# EAGLE board Modulo de expansao_01 (EAGLE 7.6.0)
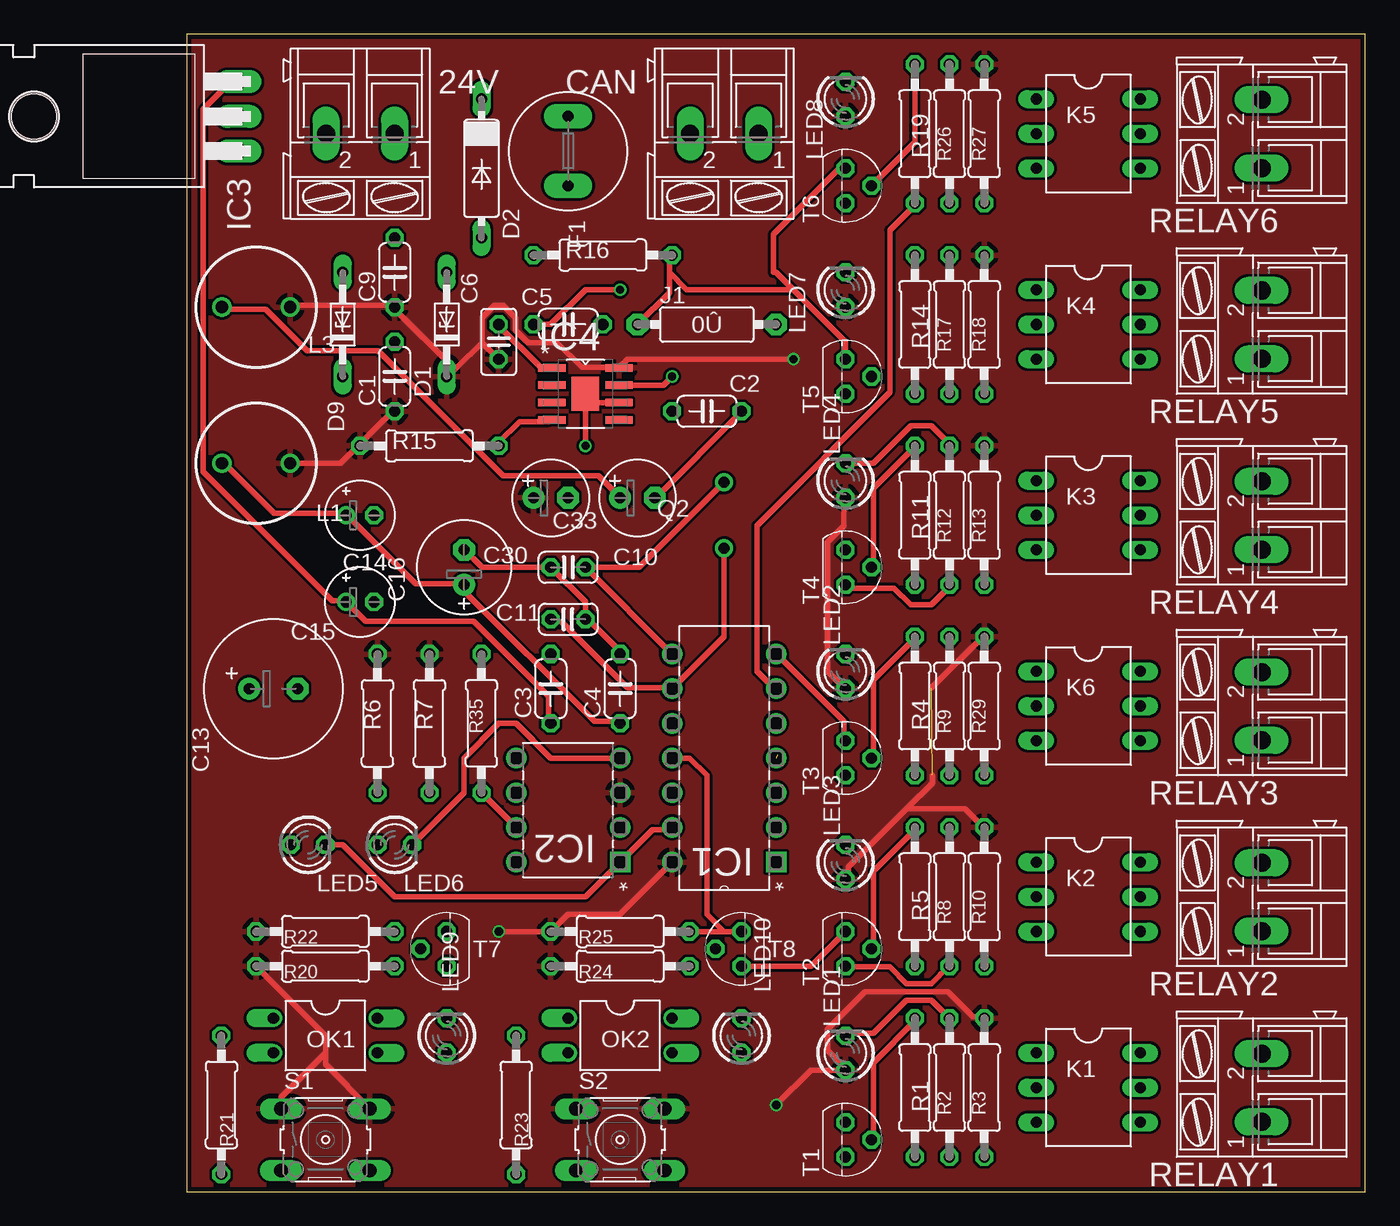
[diagram p0: board, top side]
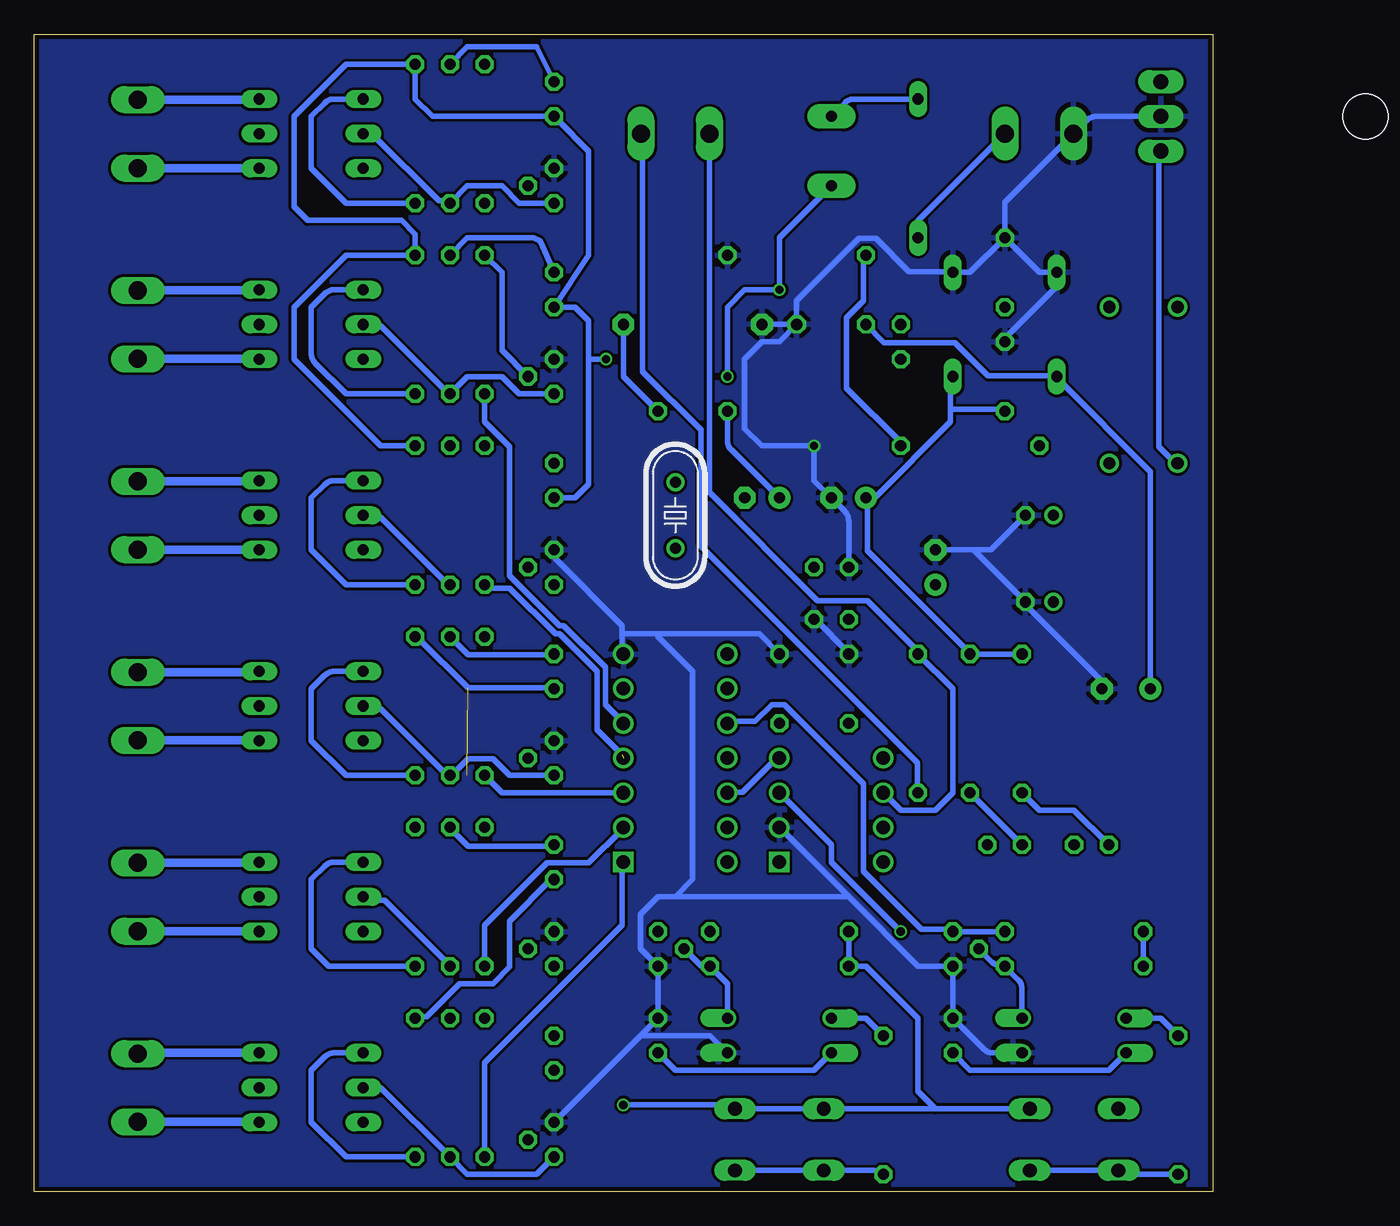
[diagram p1: board, bottom side, seen from below]

Size 86.34 x 84.76 mm. Coordinates in mm from the lower left corner, seen from the top.
Outline: 0,0 86.34,0 86.34,84.76 0,84.76 0,0
Copper layers (1*16): Top 0.035mm / dielectric 1.5mm / Bottom 0.035mm
Design rules "rules_IPCA_EEC_v2017": minimum track width 6mil, minimum drill 0.6mm, track to track 8mil, track to pad 14mil, pad to pad 14mil, via to via 8mil, smd to smd 8mil, copper to edge 14mil, drill to drill 14mil, minimum pad ring 10mil, minimum via ring 6mil, stop-mask expansion 2mil, vias tented up to drill 100mil, thermal gap 14mil
Net classes: 0 default: width 0.406 mm, drill 0.6 mm

## Footprints (pad centres in the part's own frame; a part is rotated, then mirrored left to right if it is on the bottom)
AK300/2 = drill 1.321 long: 1 -2.515,0; 2 2.489,0
C050-024X044 = drill 0.813 octagon: 1 -2.54,0; 2 2.54,0
C025-025X050 = drill 0.813 octagon: 1 -1.27,0; 2 1.27,0
C025-024X044 = drill 0.813 octagon: 1 -1.27,0; 2 1.27,0
E3,5-10 = drill 0.813 pad 1.6: + -1.778,0 | drill 0.813 pad 1.6 octagon: - 1.778,0
E2-5 = drill 0.813 pad 1.27: + -1.016,0 | drill 0.813 pad 1.27 octagon: - 1.016,0
E2,5-7 = drill 0.813 pad 1.6: + -1.27,0 | drill 0.813 pad 1.6 octagon: - 1.27,0
E2,5-6 = drill 0.813 pad 1.6: + -1.27,0 | drill 0.813 pad 1.6 octagon: - 1.27,0
DO34Z7 = drill 0.813 long: A 3.81,0; C -3.81,0
DO07 = drill 0.813 long: A 5.08,0; C -5.08,0
TR5 = drill 0.813 pad 1.778 long: 1 -2.54,0; 2 2.54,0
DIP254P762X432-14 = drill 0.991 square: 1 -7.62,15.24 | drill 0.991: 2 -7.62,12.7; 3 -7.62,10.16; 4 -7.62,7.62; 5 -7.62,5.08; 6 -7.62,2.54; 7 -7.62,0; 8 0,0; 9 0,2.54; 10 0,5.08; 11 0,7.62; 12 0,10.16; 13 0,12.7; 14 0,15.24
DIP254P762X432-8 = drill 0.991 square: 1 -7.62,7.62 | drill 0.991: 2 -7.62,5.08; 3 -7.62,2.54; 4 -7.62,0; 5 0,0; 6 0,2.54; 7 0,5.08; 8 0,7.62
TO220H = drill 1.118 long: 1 -2.54,-10.16; 2 0,-10.16; 3 2.54,-10.16 | hole 3.302: 0,4.826
SOIC127P600X170-9N = smd 1.981 x 0.559: 1 -2.464,1.905; 2 -2.464,0.635; 3 -2.464,-0.635; 4 -2.464,-1.905; 5 2.464,-1.905; 6 2.464,-0.635; 7 2.464,0.635; 8 2.464,1.905 | smd 2.007 x 2.489: 9 0,0
0R/10 = drill 0.813 pad 1.6 octagon: 1 -5.08,0; 2 5.08,0
DIL06 = drill 0.813 long: 1 -2.54,-3.81; 2 0,-3.81; 3 2.54,-3.81; 4 2.54,3.81; 5 0,3.81; 6 -2.54,3.81
6000-XXXX-RC = drill 0.9 pad 1.422: 1 -2.5,0; 2 2.5,0
LED3MM = drill 0.813 octagon: A -1.27,0; K 1.27,0
DIL04 = drill 0.813 offset: 1 -1.27,-3.81; 2 1.27,-3.81; 3 1.27,3.81; 4 -1.27,3.81
HC49/S = drill 0.813: 1 -2.413,0; 2 2.413,0
0207/10 = drill 0.813 octagon: 1 -5.08,0; 2 5.08,0
B3F-10XX = drill 1.016 long: 1 -3.251,2.261; 2 3.251,2.261; 3 -3.251,-2.261; 4 3.251,-2.261
TO92 = drill 0.813 octagon: 1 1.27,0; 2 0,1.905; 3 -1.27,0

## Placement (x,y rotation side)
24V  [AK300/2]  12.7,77.47 180 top
C1  100nF  [C050-024X044]  15.24,59.69 90 top
C2  100nF  [C050-024X044]  38.1,57.15 0 top
C3  100nF  [C050-024X044]  26.67,36.83 90 top
C4  100nF  [C050-024X044]  31.75,36.83 90 top
C5  100nF  [C050-024X044]  27.94,63.5 0 top
C6  10nF  [C025-025X050]  22.86,62.23 90 top
C9  100n  [C050-024X044]  15.24,67.31 90 top
C10  15p  [C025-024X044]  27.94,45.72 0 top
C11  15p  [C025-024X044]  27.94,41.91 180 top
C13  100uF/50V  [E3,5-10]  6.35,36.83 0 top
C14  100uF/15V  [E2-5]  12.7,49.53 0 top
C15  10uF/15V  [E2-5]  12.7,43.18 0 top
C16  220uF/ESR  [E2,5-7]  20.32,45.72 90 top
C30  10uF/15V  [E2,5-6]  26.67,50.8 0 top
C33  10uF/15V  [E2,5-6]  33.02,50.8 0 top
CAN  [AK300/2]  39.37,77.47 180 top
D1  SB3100  [DO34Z7]  19.05,63.5 90 top
D2  1N5400G-T  [DO07]  21.59,74.93 270 top
D9  BZV85C33  [DO34Z7]  11.43,63.5 90 top
F1  [TR5]  27.94,76.2 270 top
IC1  MCP25050-I/P  [DIP254P762X432-14]  35.56,39.37 180 top
IC2  MCP2551-I/P  [DIP254P762X432-8]  24.13,31.75 180 top
IC3  LM1117T-3.3/NOPB  [TO220H]  -6.35,78.74 90 top
IC4  [SOIC127P600X170-9N]  29.21,58.42 0 top
J1  [0R/10]  38.1,63.5 0 top
K1  AQV21  [DIL06]  66.04,7.62 270 top
K2  AQV21  [DIL06]  66.04,21.59 270 top
K3  AQV21  [DIL06]  66.04,49.53 270 top
K4  AQV21  [DIL06]  66.04,63.5 270 top
K5  AQV21  [DIL06]  66.04,77.47 270 top
K6  AQV21  [DIL06]  66.04,35.56 270 top
L1  15uH/3A  [6000-XXXX-RC]  5.08,53.34 0 top
L3  22uH/5mA  [6000-XXXX-RC]  5.08,64.77 180 top
LED1  [LED3MM]  48.26,10.16 90 top
LED2  [LED3MM]  48.26,38.1 90 top
LED3  [LED3MM]  48.26,24.13 90 top
LED4  [LED3MM]  48.26,52.07 90 top
LED5  [LED3MM]  8.89,25.4 0 top
LED6  [LED3MM]  15.24,25.4 0 top
LED7  [LED3MM]  48.26,66.04 90 top
LED8  [LED3MM]  48.26,80.01 90 top
LED9  [LED3MM]  19.05,11.43 90 top
LED10  [LED3MM]  40.64,11.43 90 top
OK1  LTV816  [DIL04]  10.16,11.43 270 top
OK2  LTV816  [DIL04]  31.75,11.43 270 top
Q2  20M  [HC49/S]  39.37,49.53 270 bottom
R1  1K  [0207/10]  53.34,7.62 90 top
R2  1K  [0207/10]  55.88,7.62 90 top
R3  150  [0207/10]  58.42,7.62 90 top
R4  1K  [0207/10]  53.34,35.56 90 top
R5  1K  [0207/10]  53.34,21.59 90 top
R6  330  [0207/10]  13.97,34.29 270 top
R7  330  [0207/10]  17.78,34.29 270 top
R8  1K  [0207/10]  55.88,21.59 90 top
R9  1K  [0207/10]  55.88,35.56 90 top
R10  150  [0207/10]  58.42,21.59 90 top
R11  1K  [0207/10]  53.34,49.53 90 top
R12  1K  [0207/10]  55.88,49.53 90 top
R13  150  [0207/10]  58.42,49.53 90 top
R14  1K  [0207/10]  53.34,63.5 90 top
R15  10K  [0207/10]  17.78,54.61 180 top
R16  3K24  [0207/10]  30.48,68.58 180 top
R17  1K  [0207/10]  55.88,63.5 90 top
R18  150  [0207/10]  58.42,63.5 90 top
R19  1K  [0207/10]  53.34,77.47 90 top
R20  10k  [0207/10]  10.16,16.51 180 top
R21  220  [0207/10]  2.54,6.35 270 top
R22  10K  [0207/10]  10.16,19.05 180 top
R23  220  [0207/10]  24.13,6.35 270 top
R24  10k  [0207/10]  31.75,16.51 180 top
R25  10K  [0207/10]  31.75,19.05 180 top
R26  1K  [0207/10]  55.88,77.47 90 top
R27  150  [0207/10]  58.42,77.47 90 top
R29  150  [0207/10]  58.42,35.56 90 top
R35  120  [0207/10]  21.59,34.29 90 top
RELAY1  [AK300/2]  78.74,7.62 90 top
RELAY2  [AK300/2]  78.74,21.59 90 top
RELAY3  [AK300/2]  78.74,35.56 90 top
RELAY4  [AK300/2]  78.74,49.53 90 top
RELAY5  [AK300/2]  78.74,63.5 90 top
RELAY6  [AK300/2]  78.74,77.47 90 top
S1  [B3F-10XX]  10.16,3.81 0 top
S2  [B3F-10XX]  31.75,3.81 0 top
T1  2N3904  [TO92]  48.26,3.81 270 top
T2  2N3904  [TO92]  48.26,17.78 270 top
T3  2N3904  [TO92]  48.26,31.75 270 top
T4  2N3904  [TO92]  48.26,45.72 270 top
T5  2N3904  [TO92]  48.26,59.69 270 top
T6  2N3904  [TO92]  48.26,73.66 270 top
T7  2N3904  [TO92]  19.05,17.78 90 top
T8  2N3904  [TO92]  40.64,17.78 90 top

## Library data of the parts
24V CAN RELAY1-RELAY6 = con-ptr500; OC_FARNELL: unknown; OC_NEWARK: unknown
C1-C6 C9-C11 C13-C16 C30 C33 L1 L3 R1-R27 R29 R35 = rcl
D1 D2 D9 = diode
F1 = fuse; OC_FARNELL: unknown; OC_NEWARK: unknown
IC1 = MCP25050-IP; MPN: MCP25050-I/P; OC_FARNELL: 1439736; OC_NEWARK: 59K0224; PACKAGE: DIP-14; SUPPLIER: Microchip
IC2 = MCP2551-IP; DESCRIPTION: CAN CTRL; MPN: MCP2551-I/P; OC_FARNELL: 1292240; OC_NEWARK: 61K2947; PACKAGE: PDIP-8; SUPPLIER: Microchip
IC3 = linear
IC4 = texas_tps5430; MPN: TPS5430DDAG4; OC_FARNELL: 1220987; OC_NEWARK: 05M1620; PACKAGE: SOIC-8; SUPPLIER: TEXAS INSTRUMENTS
J1 = jumper
K1-K6 = relay; MPN: AQV210; OC_FARNELL: 1704179; OC_NEWARK: 13P0968
LED1-LED10 = led
OK1 OK2 = optocoupler; OC_FARNELL: unknown; OC_NEWARK: unknown
Q2 = crystal; OC_FARNELL: 1667008; OC_NEWARK: unknown
S1 S2 = switch-omron; MPN: B3F-1000; OC_FARNELL: 176432; OC_NEWARK: 36M3542
T1-T8 = transistor

## Nets
5V: C1.1 C6.1 C9.1 C30.+ D1.C IC1.14 IC2.3 IC4.8 L1.2 L3.1 LED1.A LED2.A LED3.A LED4.A LED7.A LED8.A R3.2 R6.1 R7.1 R10.2 R13.2 R15.2 R18.2 R20.2 R22.2 R24.2 R25.2 R27.2 R29.2 S1.1 S1.2 S2.1 S2.2
24V: 24V.1 D2.A
+3.3V: C3.1 C15.+ IC3.3
AGND: C2.2 C33.- J1.2
GND: 24V.2 C1.2 C3.2 C4.2 C5.2 C9.2 C10.1 C11.1 C13.- C14.- C15.- C16.- C30.- D1.A D9.A IC1.7 IC2.2 IC3.2 IC4.6 IC4.9 J1.1 LED9.K LED10.K OK1.3 OK2.3 R16.1 T1.3 T2.3 T3.3 T4.3 T5.3 T6.3 T7.3 T8.3
GP0: IC1.1 R1.1
GP1: IC1.2 R5.1
GP2: IC1.3 R4.1
GP3: IC1.4 R11.1
GP4: IC1.5 R14.1
GP5: IC1.6 R19.1
GP6: IC1.10 R22.1 T7.1
GP7: IC1.11 R25.1 T8.1
N$1: LED1.K R2.2
N$2: K1.2 R2.1 T1.1
N$3: R1.2 T1.2
N$4: K1.6 RELAY1.2
N$5: K1.4 RELAY1.1
N$6: LED3.K R8.2
N$7: K2.2 R8.1 T2.1
N$8: R5.2 T2.2
N$9: K2.6 RELAY2.2
N$10: R4.2 T3.2
N$11: LED2.K R9.2
N$12: K6.2 R9.1 T3.1
N$13: K6.6 RELAY3.2
N$14: K6.4 RELAY3.1
N$15: K2.4 RELAY2.1
N$16: LED4.K R12.2
N$17: K3.2 R12.1 T4.1
N$18: R11.2 T4.2
N$19: K3.6 RELAY4.2
N$20: K3.4 RELAY4.1
N$21: C5.1 C13.+ D9.C F1.2 IC4.7
N$22: LED7.K R17.2
N$23: D2.C F1.1
N$24: LED5.A R6.2
N$25: LED6.A R7.2
N$26: K4.2 R17.1 T5.1
N$27: R14.2 T5.2
N$28: K4.6 RELAY5.2
N$29: K4.4 RELAY5.1
N$30: LED8.K R26.2
N$31: CAN.2 IC2.6 R35.2
N$32: CAN.1 IC2.7 R35.1
N$33: K5.2 R26.1 T6.1
N$34: R19.2 T6.2
N$35: K5.6 RELAY6.2
N$36: K5.4 RELAY6.1
N$37: OK1.4 R20.1 T7.2
N$38: R23.2 S2.3 S2.4
N$39: OK2.1 R23.1
N$40: OK2.4 R24.1 T8.2
N$41: LED9.A OK1.2
N$42: LED10.A OK2.2
N$43: K2.1 R10.1
N$44: K4.1 R18.1
N$45: K1.1 R3.1
N$46: K3.1 R13.1
N$47: K5.1 R27.1
N$48: K6.1 R29.1
N$57: R21.2 S1.3 S1.4
N$59: OK1.1 R21.1
N$65: C4.1 C14.+ C16.+ IC3.1 L1.1
N$66: C6.2 IC4.1
N$67: IC4.4 R15.1 R16.2
OSC1: C10.2 IC1.8 Q2.1
OSC2: C11.2 IC1.9 Q2.2
RXCAN: IC1.12 IC2.4 LED6.K
TXCAN: IC1.13 IC2.1 LED5.K
VCC/2: C2.1 C33.+ L3.2

## Tracks (layer width: path | path; a pad name or v marks a point on that pad's centre or on a via)
5V  (via drill 0.6)  (1 unrouted)
  Top 0.406: 52.73,28.04 48.46,23.77 48.46,22.86 LED3.A | 52.73,28.04 57,28.04 58.22,26.82 R10.2 | LED4.A 48.16,50.6 48.16,48.77 46.94,47.55 46.94,38.1 48.16,36.88 LED2.A | C1.1 15.24,57.3 12.8,54.86 R15.2 12.5,54.56 11.28,53.34 L1.2 | 21.64,62.18 21.64,64.01 22.55,64.92 23.16,64.92 24.08,64.01 24.08,63.09 24.99,62.18 27.13,62.18 28.96,60.35 31.39,60.35 IC4.8 32.31,60.96 v44.45,60.96 | C6.1 21.64,62.18 | 21.64,62.18 19.81,60.35 | 19.81,60.35 19.2,59.74 D1.C | 19.81,60.35 19.51,60.35 15.24,64.62 C9.1 15.24,64.92 7.62,64.92 L3.1 | R3.2 58.22,12.8 57.61,12.8 55.78,14.63 49.68,14.63 46.94,11.89 46.94,10.36 48.16,9.14 LED1.A 45.72,8.89 v43.18,6.35 | 54.56,36.88 58.22,40.54 R29.2 | 52.73,28.04 54.61,29.92 54.61,30.48 | IC1.14 31.75,20.32 27.94,20.32 R25.2 v22.86,19.05 | R20.2 10.16,11.43 10.16,10.16 | 10.16,10.16 6.91,6.91 S1.1 | S1.2 10.16,9.32 10.16,10.16
  Bottom 0.406: R3.2 58.22,12.8 57.61,12.8 55.17,15.24 52.73,15.24 51.51,16.46 51.51,19.81 48.46,22.86 LED3.A | LED2.A 48.46,36.88 54.56,36.88 58.22,40.54 R29.2 | 19.2,57.3 19.2,59.44 D1.C | 19.2,57.3 19.2,56.39 24.69,50.9 25.3,50.9 C30.+ 25.3,50.6 25.3,46.94 17.98,39.62 R7.1 R6.1 | 19.2,57.3 15.24,57.3 C1.1 | LED8.A 48.26,79.15 | 48.26,79.15 arc-45 47.97,78.45 45.72,76.2 45.72,68.58 LED7.A 46.72,64.77 45.72,63.77 45.72,60.96 | v43.18,6.35 35.28,6.35 S2.2 S2.1 20.32,6.07 | 48.26,79.15 48.67,78.74 57.15,78.74 58.42,80.01 R27.2 63.5,82.55 67.31,78.74 67.31,72.12 66.31,71.12 59.42,71.12 58.42,70.12 R18.2 63.5,68.58 67.31,64.77 67.31,60.96 60.96,54.61 R13.2 | LED4.A 46.72,50.8 45.72,51.8 45.72,60.96 | v44.45,60.96 45.72,60.96 | R22.2 R20.2 | S1.2 20.32,6.07 | R25.2 R24.2 25.4,16.51 21.59,12.7 21.59,7.34 20.32,6.07 | v22.86,19.05 27.94,24.13 27.94,25.4 IC2.3
  pour Top: 0,85.09 0,0 86.36,0 86.36,85.09
24V
  Bottom 0.406: 24V.1 21.59,71.09 D2.A
+3.3V
  Top 0.406: C3.1 26.52,34.44 26.52,36.27 21.03,41.76 13.11,41.76 C15.+ 11.58,43.28 10.67,43.28 1.22,52.73 1.22,79.25 3.05,81.08 3.66,81.08 IC3.3
AGND
  Top 0.406: C33.- 34.44,50.9 40.54,57 C2.2
  Bottom 0.406: C2.2 43.18,59.69 J1.2
GND  (via drill 0.6)
  Top 0.406: 35.36,67.31 35.36,65.84 J1.1 | 35.36,67.31 35.36,68.58 R16.1 | T3.3 48.16,33.22 48.16,34.44 43.28,39.32 IC1.7 | C4.2 31.7,39.62 29.26,42.06 C11.1 29.21,43.18 C10.1 21.64,45.72 20.42,46.94 C16.- | T2.3 45.72,16.51 T8.3 | v29.21,54.61 IC4.9 29.84,57.78 IC4.6 | T5.3 48.26,62.23 44.45,66.04 | 44.45,66.04 43.18,67.31 42.98,67.31 42.98,70.1 47.8,74.93 T6.3 | 44.45,66.04 36.63,66.04 35.36,67.31
  Bottom 0.406: C1.2 15.24,62.48 11.58,66.14 11.58,67.06 D9.A 12.7,67.31 C9.2 | C5.2 30.48,65.23 25.91,69.8 24.69,69.8 22.25,67.36 19.2,67.36 D1.A 17.78,67.31 C9.2 | 43.28,40.84 43.28,39.62 IC1.7 | 43.28,40.84 43.28,41.45 48.16,46.33 48.16,46.94 T4.3 | C3.2 26.82,39.62 28.96,41.76 C11.1 | C13.- 8.23,36.88 8.23,37.49 13.72,42.98 C15.- 17.53,46.99 | 20.12,46.94 C16.- 17.53,46.99 | 40.64,40.84 33.22,40.84 C4.2 | 40.64,40.84 43.28,40.84 | OK1.3 16.1,10.16 arc45 16.8,10.45 LED9.K T7.3 21.59,16.51 26.67,21.59 | IC3.2 8.53,78.74 arc-45 9.23,78.45 24V.2 15.24,72.44 C9.2 | C10.1 26.67,49.12 arc-45 26.96,49.82 C30.- 29.21,52.07 v29.21,54.61 33.02,54.61 34.29,55.88 34.29,60.96 33.02,62.23 31.75,62.23 C5.2 | C14.- 16.26,46.99 17.53,46.99 | 41.91,11.43 LED10.K T8.3 41.91,17.78 41.91,20.32 40.64,21.59 39.37,21.59 | 41.91,11.43 T1.3 | OK2.3 36.83,11.43 41.91,11.43 | C5.2 J1.1 | 26.67,21.59 IC2.2 | 39.37,21.59 38.1,22.86 38.1,38.1 40.64,40.64 40.64,40.84 | 39.37,21.59 26.67,21.59
  pour Bottom: 0,85.09 0,0 86.36,0 86.36,85.09
GP0
  Bottom 0.406: R1.1 53.34,9.45 43.28,19.51 43.28,24.08 IC1.1
GP1
  Bottom 0.406: R5.1 53.34,19.51 48.77,24.08 45.72,24.08 43.28,26.52 IC1.2
GP2
  Bottom 0.406: R4.1 52.07,29.21 IC1.3
GP3  (1 unrouted)
  Bottom 0.406: 43.28,32 45.11,33.83 45.11,38.1 47.85,40.84 48.16,40.84 51.51,44.2 53.34,44.2 R11.1
GP4
  Bottom 0.406: R14.1 53.34,56.39 51.51,54.56 51.51,45.11 47.85,41.45 47.55,41.45 44.5,38.41 44.5,35.66 43.28,34.44 IC1.5
GP5
  Top 0.406: R19.1 53.34,72.24 51.51,70.41 51.51,58.52 41.76,48.77 41.76,38.1 42.98,36.88 IC1.6
GP6
  Bottom 0.406: IC1.10 35.36,34.44 33.53,34.44 32.31,35.66 31.39,35.66 25.6,29.87 25.6,23.47 21.34,19.2 19.2,19.2 T7.1 R22.1
GP7
  Top 0.406: T8.1 39.37,19.05 | 39.37,19.05 R25.1 | IC1.11 36.83,31.75 38.1,30.48 38.1,20.32 39.37,19.05
N$1
  Top 0.406: R2.2 54.56,14.02 52.73,14.02 50.29,11.58 48.46,11.58 LED1.K
N$2
  Bottom 0.406: K1.2 60.96,7.62 R2.1 54.61,1.27 49.53,1.27 T1.1
N$3
  Top 0.406: T1.2 50.29,3.96 50.29,9.45 53.34,12.5 R1.2
N$4
  Bottom 0.406: 78.62,10.16 arc-45 RELAY1.2
  Bottom 0.61: K1.6 77.47,10.16 77.52,10.11 RELAY1.2
N$5
  Bottom 0.406: 78.68,5.08 arc45 RELAY1.1
  Bottom 0.61: K1.4 69.88,5.11 RELAY1.1
N$6
  Bottom 0.406: LED3.K 48.46,25.3 54.56,25.3 55.78,26.52 R8.2
N$7
  Top 0.406: T2.1 48.46,16.46 51.51,16.46 52.73,15.24 54.56,15.24 55.78,16.46 R8.1
  Bottom 0.406: K2.2 62.18,21.34 60.66,21.34 56.08,16.76 R8.1
N$8
  Top 0.406: T2.2 50.29,17.98 50.29,23.47 53.34,26.52 R5.2
N$9
  Bottom 0.406: 78.62,24.13 arc-45 RELAY2.2
  Bottom 0.61: K2.6 69.9,24.08 RELAY2.2
N$10
  Top 0.406: T3.2 50.29,32 50.29,37.49 53.34,40.54 R4.2
N$11
  Bottom 0.406: R9.2 54.56,39.32 48.46,39.32 LED2.K
N$12
  Bottom 0.406: T3.1 51.51,30.48 52.73,31.7 54.56,31.7 55.78,30.48 R9.1 56.08,30.48 60.96,35.36 62.18,35.36 K6.2
N$13
  Bottom 0.406: 78.62,38.1 arc-45 RELAY3.2
  Bottom 0.61: K6.6 69.9,38.05 RELAY3.2
N$14
  Bottom 0.406: 78.68,33.02 arc45 RELAY3.1
  Bottom 0.61: K6.4 69.88,33.05 RELAY3.1
N$15
  Bottom 0.406: 78.68,19.05 arc45 RELAY2.1
  Bottom 0.61: K2.4 69.88,19.07 RELAY2.1
N$16
  Top 0.406: LED4.K 50.29,53.34 53.03,56.08 54.56,56.08 55.78,54.86 R12.2
N$17
  Top 0.406: T4.1 48.46,44.2 51.82,44.2 53.03,42.98 54.56,42.98 55.78,44.2 R12.1
  Bottom 0.406: K3.2 62.18,49.38 60.96,49.38 56.08,44.5 R12.1
N$18
  Top 0.406: T4.2 50.29,45.72 50.29,51.51 53.34,54.56 R11.2
N$19
  Bottom 0.406: 78.62,52.07 arc-45 RELAY4.2
  Bottom 0.61: K3.6 69.9,52.02 RELAY4.2
N$20
  Bottom 0.406: 78.68,46.99 arc45 RELAY4.1
  Bottom 0.61: K3.4 69.88,47.02 RELAY4.1
N$21  (via drill 0.6)
  Top 0.406: IC4.7 34.92,59.05 v35.56,59.69 | v31.75,66.04 29.21,66.04 26.67,63.5 C5.1
  Bottom 0.406: C5.1 24.08,62.18 18.9,62.18 16.46,59.74 11.58,59.74 D9.C 11.28,59.44 4.57,52.73 C13.+ | v35.56,59.69 35.56,64.77 34.29,66.04 v31.75,66.04 31.75,69.85 F1.2
N$22
  Bottom 0.406: R17.2 54.61,69.85 49.94,69.85 arc45 49.24,69.56 LED7.K
N$23
  Bottom 0.406: D2.C 26.26,80.01 arc-45 26.96,79.72 F1.1
N$24
  Bottom 0.406: LED5.A 10.16,27.94 12.7,27.94 R6.2
N$25
  Bottom 0.406: LED6.A R7.2
N$26
  Bottom 0.406: K4.2 62.18,63.4 60.96,63.4 56.08,58.52 R17.1 54.61,59.69 52.07,59.69 50.8,58.42 T5.1
N$27
  Bottom 0.406: T5.2 52.07,61.59 52.07,67.31 R14.2
N$28
  Bottom 0.61: K4.6 69.9,65.99 RELAY5.2
N$29
  Bottom 0.61: K4.4 69.88,60.98 RELAY5.1
N$30
  Bottom 0.406: R26.2 54.61,83.82 49.53,83.82 LED8.K
N$31
  Bottom 0.406: CAN.2 36.88,51.21 28.96,43.28 25.3,43.28 21.64,39.62 R35.2 19.05,36.83 19.05,29.21 20.32,27.94 22.86,27.94 IC2.6
N$32
  Top 0.406: IC2.7 R35.1
  Bottom 0.406: CAN.1 41.76,77.42 41.76,60.05 37.49,55.78 37.49,47.24 21.64,31.39 21.64,29.26 R35.1
N$33
  Bottom 0.406: K5.2 62.18,77.42 61.57,77.42 56.69,72.54 56.08,72.54 R26.1 54.61,73.66 52.07,73.66 50.8,72.39 T6.1
N$34
  Top 0.406: T6.2 53.34,76.83 R19.2
N$35
  Bottom 0.406: 78.62,80.01 arc-45 RELAY6.2
  Bottom 0.61: K5.6 69.9,79.96 RELAY6.2
N$36
  Bottom 0.406: 78.68,74.93 arc45 RELAY6.1
  Bottom 0.61: K5.4 69.88,74.95 RELAY6.1
N$37
  Bottom 0.406: OK1.4 13.97,14.83 arc-45 14.26,15.53 R20.1 15.46,16.51 arc45 16.17,16.8 T7.2
N$38
  Bottom 0.406: S2.4 S2.3 24.8,1.55 arc45 R23.2
N$39
  Bottom 0.406: R23.1 25.4,12.7 OK2.1
N$40
  Bottom 0.406: T8.2 37.47,16.51 R24.1 35.56,15.24 OK2.4
N$41
  Bottom 0.406: OK1.2 7.62,8.89 17.78,8.89 LED9.A
N$42
  Bottom 0.406: OK2.2 29.21,8.89 39.37,8.89 LED10.A
N$43
  Bottom 0.406: K2.1 64.36,24.13 arc-45 65.06,23.84 66.04,22.86 66.04,17.78 64.77,16.51 R10.1
N$44
  Bottom 0.406: K4.1 64.36,66.04 arc-45 65.06,65.75 66.04,64.77 66.04,61.37 arc-45 65.75,60.67 63.5,58.42 R18.1
N$45
  Bottom 0.406: K1.1 64.36,10.16 arc-45 65.06,9.87 66.04,8.89 66.04,5.08 63.5,2.54 R3.1
N$46
  Bottom 0.406: K3.1 64.36,52.07 arc-45 65.06,51.78 66.04,50.8 66.04,46.99 63.5,44.45 R13.1
N$47
  Bottom 0.406: K5.1 64.36,80.01 arc-45 65.06,79.72 66.04,78.74 66.04,74.93 63.5,72.39 R27.1
N$48
  Bottom 0.406: K6.1 64.36,38.1 arc-45 65.06,37.81 66.04,36.83 66.04,33.02 63.5,30.48 R29.1
N$57
  Bottom 0.406: S1.4 S1.3 arc-45 6.23,1.27 R21.2
N$59
  Bottom 0.406: R21.1 3.81,12.7 OK1.1
N$65
  Top 0.406: C4.1 31.7,34.44 29.87,34.44 20.12,44.2 C16.+ 20.12,44.5 16.76,44.5 11.89,49.38 C14.+ 11.58,49.68 6.4,49.68 2.74,53.34 L1.1
  Bottom 0.406: IC3.1 3.96,76.2 3.96,54.56 2.74,53.34 L1.1
N$66
  Top 0.406: IC4.1 26.52,60.35 25.91,60.35 22.86,63.4 C6.2
N$67
  Top 0.406: IC4.4 26.52,56.39 24.38,56.39 22.86,54.86 R15.1
  Bottom 0.406: R16.2 25.6,68.58 25.6,65.23 26.82,64.01 26.82,58.83 22.86,54.86 R15.1
OSC1
  Top 0.406: Q2.1 33.15,45.72 C10.2 IC1.8
OSC2
  Top 0.406: C11.2 26.82,41.76 27.43,41.76 32.31,36.88 35.36,36.88 IC1.9 39.37,40.64 Q2.2
RXCAN
  Top 0.406: LED6.K 20.32,29.21 20.32,31.75 22.86,34.29 24.13,34.29 26.67,31.75 IC2.4
  Bottom 0.406: IC1.12 35.36,29.26 34.44,29.26 32,31.7 IC2.4
TXCAN
  Top 0.406: IC1.13 35.36,26.52 34.14,26.52 IC2.1 29.21,21.59 15.24,21.59 11.43,25.4 LED5.K
VCC/2
  Top 0.406: L3.2 2.74,64.62 5.79,64.62 8.84,61.57 14.02,61.57 23.16,52.43 30.18,52.43 31.7,50.9 C33.+
  Bottom 0.406: C2.1 35.56,55.02 arc-45 35.27,54.32 C33.+